# EAGLE board ProjV5Submission (EAGLE 9.6.2)
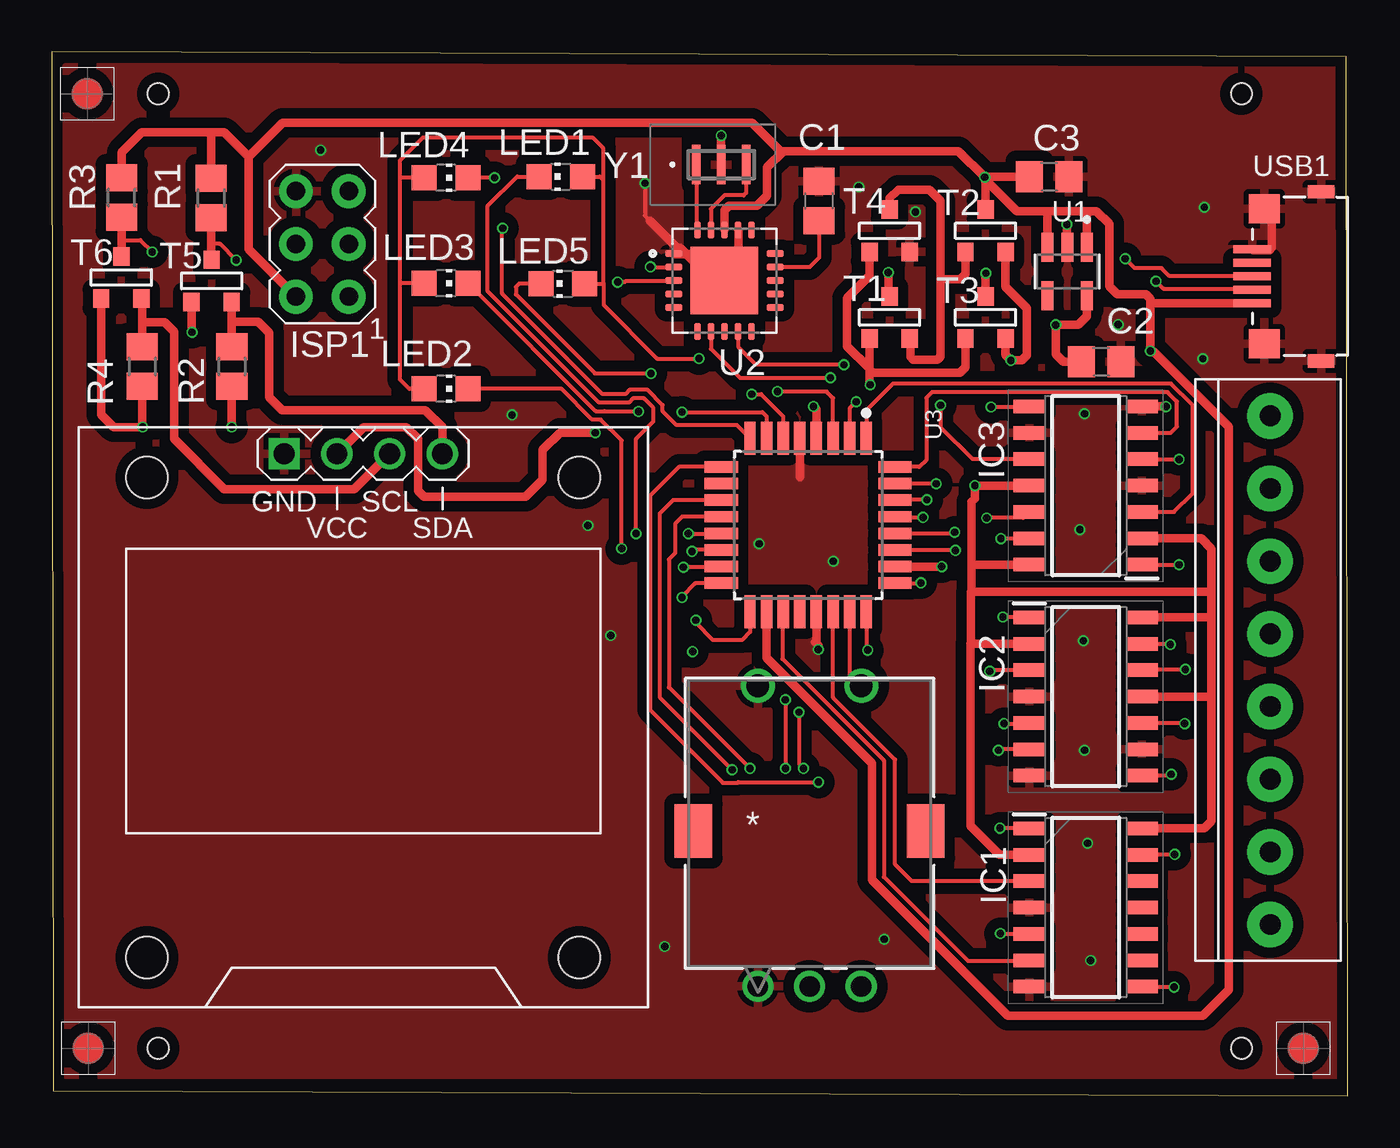
[diagram p0: board, top side]
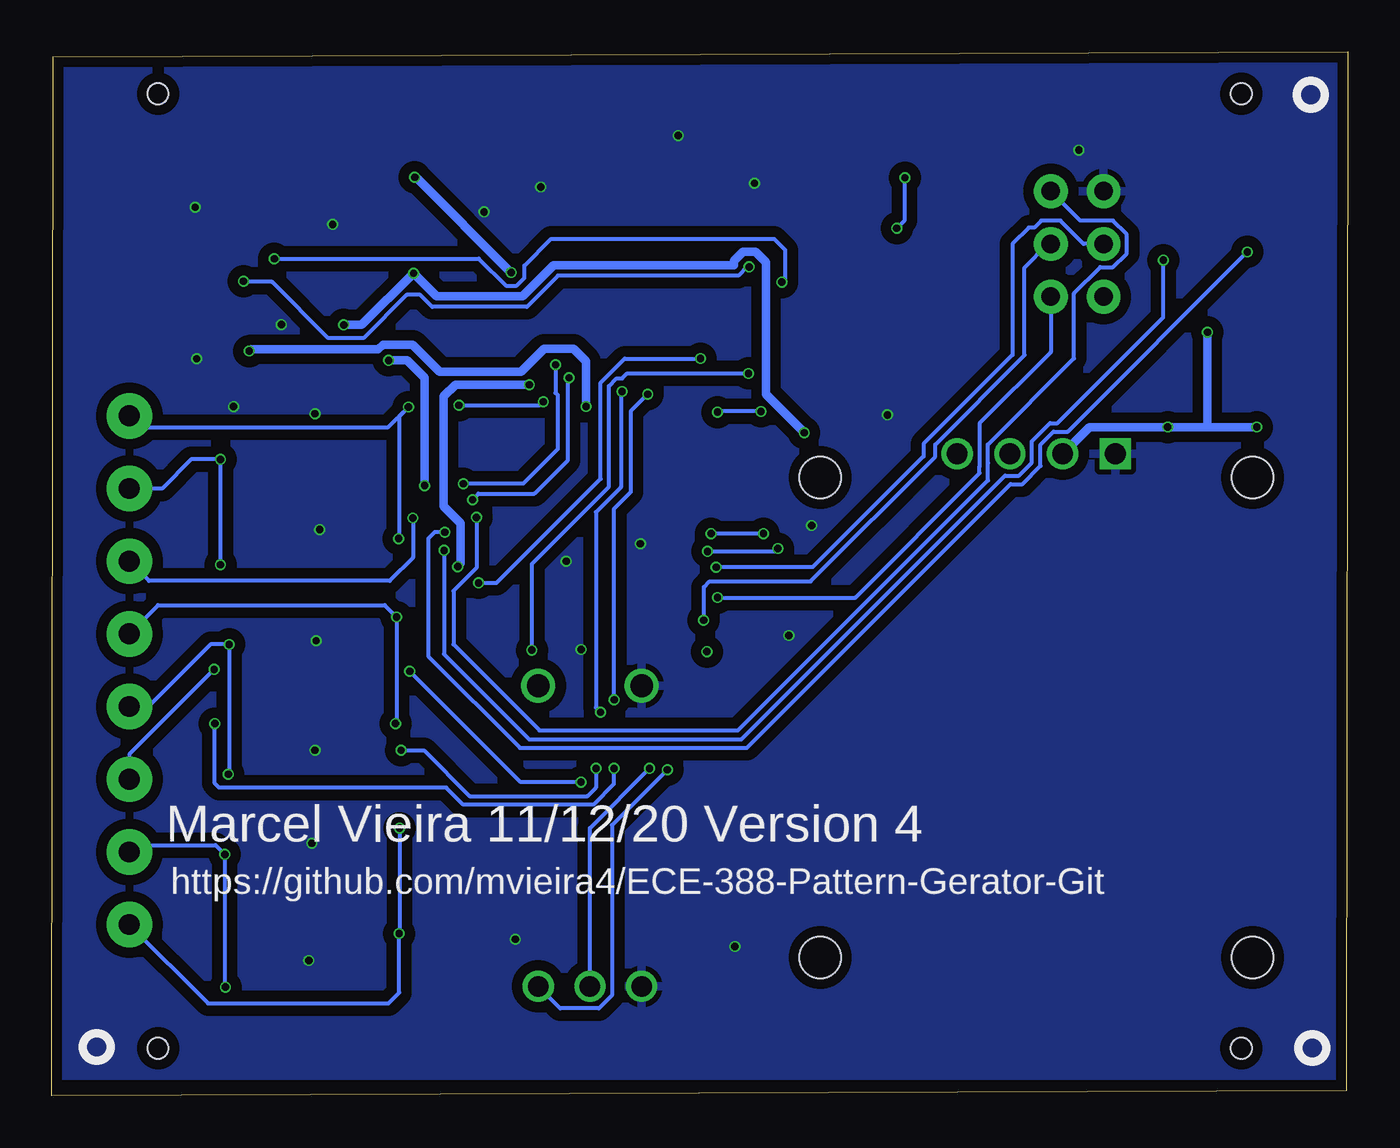
[diagram p1: board, bottom side, seen from below]

Size 62.42 x 50.27 mm. Coordinates in mm from the lower left corner, seen from the top.
Outline: 0.07,0.23 62.42,0 62.35,50.04 0,50.27 0.07,0.23
Copper layers (1*16): Top 0.035559375mm / dielectric 1.6mm / Bottom 0.035559375mm
Design rules "jlcpcb2layer": minimum track width 5mil, minimum drill 12mil, track to track 5mil, track to pad 5mil, pad to pad 5mil, via to via 5mil, smd to smd 5mil, copper to edge 8mil, drill to drill 6mil, minimum pad ring 5mil, minimum via ring 3mil, stop-mask expansion 2.5mil, vias tented up to drill 0mil, thermal gap 10mil
Holes 1 mm at 5.12,2.29 5.12,48.25 57.31,2.29 57.31,48.25

## Footprints (pad centres in the part's own frame; a part is rotated, then mirrored left to right if it is on the bottom)
C0805 = smd 1.3 x 1.5: 1 -0.95,0; 2 0.95,0
SOIC127P600X175-14N = smd 1.525 x 0.65: 1 -2.712,3.81; 2 -2.712,2.54; 3 -2.712,1.27; 4 -2.712,0; 5 -2.712,-1.27; 6 -2.712,-2.54; 7 -2.712,-3.81; 8 2.712,-3.81; 9 2.712,-2.54; 10 2.712,-1.27; 11 2.712,0; 12 2.712,1.27; 13 2.712,2.54; 14 2.712,3.81
AVRISP = drill 0.9 pad 1.626: 1 -1.27,2.54; 2 1.27,2.54; 3 -1.27,0; 4 1.27,0; 5 -1.27,-2.54; 6 1.27,-2.54
1X08-3.5MM = drill 1 pad 2.184: 1 -12.25,0; 2 -8.75,0; 3 -5.25,0; 4 -1.75,0; 5 1.75,0; 6 5.25,0; 7 8.75,0; 8 12.25,0
CHIP-LED0805 = smd 1.2 x 1.2: A 0,-1.05; C 0,1.05
R0805 = smd 1.3 x 1.5: 1 -0.95,0; 2 0.95,0
SOT-23 = smd 0.787 x 0.889: 1 0.025,-1.016; 2 -0.94,1.016; 3 0.991,1.016
SOT95P280X145-5N = smd 1.39 x 0.58: 1 -1.165,0.95; 2 -1.165,0; 3 -1.165,-0.95; 4 1.165,-0.95; 5 1.165,0.95
QFN65P500X500X100-21N = smd 0.81 x 0.32: 1 -2.45,1.3; 2 -2.45,0.65; 3 -2.45,0; 4 -2.45,-0.65; 5 -2.45,-1.3; 11 2.45,-1.3; 12 2.45,-0.65; 13 2.45,0; 14 2.45,0.65; 15 2.45,1.3 | smd 0.32 x 0.81: 6 -1.3,-2.45; 7 -0.65,-2.45; 8 0,-2.45; 9 0.65,-2.45; 10 1.3,-2.45; 16 1.3,2.45; 17 0.65,2.45; 18 0,2.45; 19 -0.65,2.45; 20 -1.3,2.45 | smd 3.25 x 3.25: 21 0,0
QFP80P900X900X120-32N = smd 1.6 x 0.55: 1 -4.18,2.8; 2 -4.18,2; 3 -4.18,1.2; 4 -4.18,0.4; 5 -4.18,-0.4; 6 -4.18,-1.2; 7 -4.18,-2; 8 -4.18,-2.8; 17 4.18,-2.8; 18 4.18,-2; 19 4.18,-1.2; 20 4.18,-0.4; 21 4.18,0.4; 22 4.18,1.2; 23 4.18,2; 24 4.18,2.8 | smd 0.55 x 1.6: 9 -2.8,-4.18; 10 -2,-4.18; 11 -1.2,-4.18; 12 -0.4,-4.18; 13 0.4,-4.18; 14 1.2,-4.18; 15 2,-4.18; 16 2.8,-4.18; 25 2.8,4.18; 26 2,4.18; 27 1.2,4.18; 28 0.4,4.18; 29 -0.4,4.18; 30 -1.2,4.18; 31 -2,4.18; 32 -2.8,4.18
EN11-HSM_TTE = drill 0.991 pad 1.499: 1 -2.489,7.874; 2 2.489,7.874; 3 0,7.874 | drill 1.092 pad 1.6: 4 -2.489,22.352; 5 2.489,22.352 | smd 1.803 x 2.591: 6 -5.601,15.354; 7 5.601,15.354
DISPLAY-OLED-128X64-I2C = drill 1 square: 1 -3.81,12.7 | drill 1: 2 -1.27,12.7; 3 1.27,12.7; 4 3.81,12.7 | hole 2: -10.414,11.557; 10.414,11.557; 10.414,-11.557; -10.414,-11.557
C77238 = smd 1.5 x 1.4: 0 0.825,0.814; 0A 0.825,7.314 | smd 1.27 x 0.635: 0B 3.566,8.139; 0C 3.566,-0.011 | smd 1.8 x 0.4: 1 0.244,2.768; 2 0.244,3.418; 3 0.244,4.068; 4 0.244,4.718; 5 0.244,5.369
CSTNE12M0G55A000R0 = smd 0.4 x 1.9: 1 1.2,0; 2 0,0; 3 -1.2,0

## Placement (x,y rotation side)
C1  1u  [C0805]  36.96,43.09 90 top
C2  1u  [C0805]  50.54,35.35 0 top
C3  1u  [C0805]  48.04,44.26 0 top
IC1  CD4007UBM  [SOIC127P600X175-14N]  49.8,9.06 0 top
IC2  CD4007UBM  [SOIC127P600X175-14N]  49.8,19.22 0 top
IC3  CD4007UBM  [SOIC127P600X175-14N]  49.8,29.38 180 top
ISP1  AVRISP-6  [AVRISP]  13.03,41.02 180 top
JP1  [1X08-3.5MM]  58.69,20.49 270 top
LED1  [CHIP-LED0805]  24.51,44.26 90 top
LED2  [CHIP-LED0805]  18.99,34.04 270 top
LED3  [CHIP-LED0805]  18.99,39.12 270 top
LED4  [CHIP-LED0805]  18.99,44.2 270 top
LED5  [CHIP-LED0805]  24.61,39.11 90 top
R1  10k  [R0805]  7.68,43.24 90 top
R2  10k  [R0805]  8.67,35.12 270 top
R3  10k  [R0805]  3.36,43.25 90 top
R4  10k  [R0805]  4.35,35.11 270 top
T1  [SOT-23]  40.38,37.48 180 top
T2  [SOT-23]  45,41.65 180 top
T3  [SOT-23]  45,37.48 180 top
T4  [SOT-23]  40.38,41.65 180 top
T5  [SOT-23]  7.72,39.24 180 top
T6  [SOT-23]  3.37,39.4 180 top
U1  MIC5504-3.3YM5-T5  [SOT95P280X145-5N]  48.91,39.69 270 top
U2  MCP2200-I/MQ  [QFN65P500X500X100-21N]  32.4,39.25 0 top
U3  ATMEGA328PB-AU  [QFP80P900X900X120-32N]  36.43,27.48 270 top
U4  EN11-HSM1BF20  [EN11-HSM_TTE]  36.5,-2.61 0 top
U$1  DISPLAY-OLED-128X64-I2C  [DISPLAY-OLED-128X64-I2C]  15,18.22 0 top
U$2  [FIDUCIAL_G15S]  1.75,2.29 0 top
U$3  [FIDUCIAL_G15S]  1.7,48.25 0 top
U$4  [FIDUCIAL_G15S]  60.29,2.29 0 top
USB1  C77238  [C77238]  57.58,35.4 0 top
Y1  CSTNE12M0G55A000R0  [CSTNE12M0G55A000R0]  32.25,44.84 180 top

## Library data of the parts
C1-C3 = rcl; SPICEPREFIX: C
IC1-IC3 = CD4007UBM; ARROW_PART_NUMBER: CD4007UBM; ARROW_PRICE-STOCK: https://www.arrow.com/en/products/cd4007ubm/texas-instruments; DESCRIPTION: Texas Instruments CD4007UBM Inverter, 3 18 V, 14-Pin SOIC; HEIGHT: 1.75mm; MANUFACTURER_NAME: Texas Instruments; MANUFACTURER_PART_NUMBER: CD4007UBM; MOUSER_PART_NUMBER: 595-CD4007UBM; MOUSER_PRICE-STOCK: https://www.mouser.co.uk/ProductDetail/Texas-Instruments/CD4007UBM?qs=LfG3tU9ud8BhOMkMTdqqtw%3D%3D
ISP1 JP1 = adafruit
LED1-LED5 = led
R1-R4 = rcl; SPICEPREFIX: R
T1-T6 = zetex; OC_FARNELL: unknown; OC_NEWARK: unknown
U1 = MIC5504-3.3YM5-T5; AVAILABILITY: Good; DESCRIPTION: Linear Voltage Regulator IC 1 Output 300mA SOT-23-5; MF: Microchip; MP: MIC5504-3.3YM5-T5; PACKAGE: SOT-23-5 Microchip; PRICE: None; PURCHASE-URL: https://pricing.snapeda.com/search/part/MIC5504-3.3YM5-T5/?ref=eda
U2 = MCP2200-I_MQ; AVAILABILITY: Good; DESCRIPTION: USB Bridge, USB to UART USB 2.0 UART Interface 20-VQFN (5x5); MF: Microchip; MP: MCP2200-I/MQ; PACKAGE: VQFN-20 Microchip; PRICE: None; PURCHASE-URL: https://pricing.snapeda.com/search/part/MCP2200-I/MQ/?ref=eda
U3 = ATMEGA328PB-AU; AVAILABILITY: Good; DESCRIPTION: 8-bit Microcontrollers - MCU ATMEGA328PB 20MHZ IND TEMP; MF: Microchip Technology / Atmel; MP: ATMEGA328PB-AU; PACKAGE: None; PRICE: None; PURCHASE-URL: https://pricing.snapeda.com/search/part/ATMEGA328PB-AU/?ref=eda
U4 = EN11-HSM1BF20; MANUFACTURER_PART_NUMBER: EN11-HSM1BF20; SOURCELIBRARY: TTELECTRONICS_2018-05-01A; VENDOR: TT Electronics
U$1 = diy-modules
U$2-U$4 = dicons
USB1 = usbFromLCSC
Y1 = CSTNE12M0G55A000R0; ARROW_PART_NUMBER: CSTNE12M0G55A000R0; ARROW_PRICE-STOCK: https://www.arrow.com/en/products/cstne12m0g55a000r0/murata-manufacturing; DESCRIPTION: Resonators 12.0000MHz 33pF SMD CHP Resntr AUTO GRD; HEIGHT: 0.8mm; MANUFACTURER_NAME: Murata Electronics; MANUFACTURER_PART_NUMBER: CSTNE12M0G55A000R0; MOUSER_PART_NUMBER: 81-CSTNE12M0G55A000R; MOUSER_PRICE-STOCK: https://www.mouser.com/Search/Refine.aspx?Keyword=81-CSTNE12M0G55A000R

## Nets
0: C1.2 C2.2 C3.2 IC1.4 IC1.7 IC2.4 IC2.7 IC2.9 IC3.4 IC3.7 IC3.9 ISP1.6 T4.2 U1.2 U2.1 U2.17 U2.21 U3.5 U3.21 U4.1 U4.4 U$1.1 USB1.0 USB1.0A USB1.0B USB1.0C USB1.5 Y1.2
+3V3: C2.1 R2.2 R4.2 T3.1 T5.3 T6.3 U1.5 U$1.2
+5V: C3.1 ISP1.2 R1.2 R3.2 T1.1 T2.1 U1.1 U1.3 U2.18 U3.4 U3.18 USB1.1
C1: IC3.8 IC3.13 JP1.1
C2: IC3.1 IC3.5 JP1.2
C3: IC3.12 JP1.3
C4: IC2.1 IC2.5 JP1.4
C5: IC2.8 IC2.13 JP1.5
C6: IC2.12 JP1.6
C7: IC1.8 IC1.13 JP1.7
C8: IC1.1 IC1.5 JP1.8
CLK: U3.12 U4.3
D+: U2.3 USB1.3
D-: U2.2 USB1.2
DT: U3.23 U4.5
LC: IC1.2 IC1.14 IC2.2 IC2.11 IC2.14 IC3.2 IC3.11 IC3.14 T2.2 T3.2
LC1: IC3.6 U3.32
LC2: IC3.3 U3.1
LC3: IC3.10 U3.2
LC4: IC2.3 U3.9
LC5: IC2.6 U3.3
LC6: IC2.10 U3.6
LC7: IC1.6 U3.19
LC8: IC1.3 U3.22
LED1: LED1.C U3.13
LED2: LED2.C U3.14
LED3: LED3.C U3.7
LED4: LED4.C U3.8
LED5: LED5.C U3.24
LEDA: LED1.A LED2.A LED3.A LED4.A LED5.A U3.25
MISO: ISP1.1 U3.16
MOSI: ISP1.4 U3.15
N$1: IC1.9
N$2: IC1.10
N$3: IC1.11
N$4: U3.10
N$5: IC1.12
N$6: U2.19 Y1.3
N$7: C1.1 U2.14
N$9: T1.2 T2.3 T4.1
N$10: U2.7 U3.30
N$11: U2.9 U3.31
N$14: U2.20 Y1.1
N$16: R2.1 T5.2 U$1.4
N$19: R4.1 T6.2 U$1.3
N$30: U3.20
RST: ISP1.5 U3.29
SCK: ISP1.3 U3.17
SCL: R3.1 T6.1 U3.28
SDA: R1.1 T5.1 U3.27
SW: U3.11 U4.2
VSET: T1.3 T3.3 T4.3 U3.26

## Tracks (layer width: path | path; a pad name or v marks a point on that pad's centre or on a via)
0  (via drill 0.35)
  Top 0.203: v28.57,43.94 28.57,42.39 28.82,42.14
  Top 0.406: IC3.7 v53.66,33.19 v53.67,33.19 | U3.21 36.83,21.89 36.77,21.83 36.92,21.68 v36.92,21.48 | U1.2 48.9,40.87 v48.9,41.96 | Y1.2 v32.25,46.23 | USB1.0A 58.78,42.33 58.78,40.84 58.66,40.72 57.87,40.72 USB1.5 | U2.1 29.98,40.53 31.05,40.53 32.33,39.25 U2.21 | U2.21 32.48,39.25 33.08,39.84 33.08,41.68 U2.17 | U2.21 31.86,39.25 30.27,40.84 30.12,40.84 28.82,42.14 | U3.5 36.03,29.77
  other vias: 12.95,45.54 22.17,32.79 51.37,37.14 38.87,43.76 55.52,42.79 41.59,42.56 49.75,32.84 49.52,27.26 49.7,21.91 49.75,16.63 50.05,6.51 49.9,12.16 26.92,22.16 34.07,26.58 37.65,25.73 55.45,35.48 40.09,7.54 29.52,7.19 25.82,27.46
  pour Top (isolate 0.508): 0.66,49.53 0.66,1.01 62.27,1.01 62.27,49.53
  pour Bottom (isolate 0.508): 0.56,49.59 0.56,0.96 61.89,0.96 61.89,49.59
+3V3  (via drill 0.35)
  Top 0.406: T5.3 6.73,36.78 v6.75,36.76 | R2.2 v8.67,32.2 | R4.2 4.35,32.23 | 4.35,32.23 v4.38,32.2 | T6.3 2.38,32.79 2.97,32.2 4.32,32.2 4.35,32.23 | U1.5 49.86,37.54 49.44,37.12 v48.36,37.12 48.36,35.71 48.72,35.35 C2.1 | T3.1 44.98,39.59 v45,39.61 | U$1.2 15.01,32.2 17.07,32.2 17.64,31.63 17.64,29.14 17.94,28.84 22.83,28.84 23.64,29.65 23.64,31.1 24.47,31.93 v26.18,31.93
  Bottom 0.406: U$1.2 13.71,30.92 12.45,32.18 8.69,32.18 v8.67,32.2 6.78,32.2 | v4.38,32.2 6.78,32.2 | v48.36,37.12 47.49,37.12 v45,39.61 43.89,38.5 39.75,38.5 38.25,40 29.57,40 29.57,40.21 29.14,40.64 28.53,40.64 28.01,40.12 28.01,33.79 26.18,31.96 v26.18,31.93 | v6.75,36.76 6.75,32.23 6.78,32.2
+5V  (via drill 0.35)
  Top 0.406: R3.2 3.36,45.43 4.32,46.39 7.71,46.39 | ISP1.2 9.48,40.76 9.48,45.22 | 9.48,45.22 8.31,46.39 7.71,46.39 | R1.2 7.68,46.36 7.71,46.39 | T1.1 40.29,38.56 v40.29,39.64 | v44.94,44.23 44.98,44.2 T2.1 | C3.1 44.97,44.26 | 44.97,44.26 v44.94,44.23 | 47.83,42.6 46.48,42.6 44.97,44.11 44.97,44.26 | U1.3 47.96,42.47 47.83,42.6 | 49.78,42.6 50.32,42.6 50.94,41.98 50.94,38.98 51.33,38.59 52.71,38.59 52.92,38.38 52.92,38.14 | 49.78,42.6 47.83,42.6 | 49.78,42.6 49.86,42.52 U1.1 | U2.18 32.4,42.64 32.61,42.85 33.96,42.85 34.45,43.34 34.45,44.71 35.23,45.49 | v44.94,44.23 43.68,45.49 35.23,45.49 | U3.4 36.83,33.05 v36.69,33.19 | 35.23,45.49 35.1,45.49 33.73,46.86 11.12,46.86 9.48,45.22 | U3.18 34.43,21.08 39.51,16 39.51,10.39 46.05,3.85 55.44,3.85 56.7,5.11 56.7,32.22 53.06,35.86 v52.92,35.86 52.92,38.14 | USB1.1 52.94,38.16 52.92,38.14
  Bottom 0.406: v40.29,39.64 44.88,44.23 v44.94,44.23 | v36.69,33.19 36.69,35.38 37.29,35.98 38.7,35.98 39.81,34.87 43.74,34.87 45.04,36.17 46.47,36.17 46.7,35.95 52.83,35.95 v52.92,35.86
C1  (via drill 0.35)
  Top 0.203: IC3.8 47.06,33.16 v45.25,33.16 | IC3.13 47.08,26.83 v45.72,26.83
  Bottom 0.203: v45.72,26.83 45.69,26.86 45.69,32.72 v45.25,33.16 46.22,32.19 58.14,32.19 JP1.1
C2  (via drill 0.35)
  Top 0.203: IC3.5 v54.29,30.65 v54.3,30.64 | IC3.1 v54.3,25.57
  Bottom 0.203: JP1.2 57.11,29.24 55.71,30.64 v54.3,30.64 v54.3,25.57
C3  (via drill 0.35)
  Top 0.203: IC3.12 46.8,27.82 v45.03,27.82
  Bottom 0.203: v45.03,27.82 45.03,25.91 46.15,24.79 57.74,24.79 JP1.3
C4  (via drill 0.35)
  Top 0.203: IC2.1 45.83,23.03 v45.81,23.05 | v45.87,17.92 47.06,17.92 IC2.5
  Bottom 0.203: v45.87,17.92 45.81,17.98 45.81,20.18 45.81,20.7 v45.81,23.05 46.38,23.62 57.31,23.62 JP1.4
C5  (via drill 0.35)
  Top 0.203: IC2.13 53.85,21.76 v53.88,21.73 | v53.92,15.47 53.86,15.41 IC2.8
  Bottom 0.203: v53.92,15.47 53.88,15.52 v53.88,21.73 54.78,21.73 57.77,18.74 JP1.5
C6  (via drill 0.35)
  Top 0.203: IC2.12 52.55,20.53 v54.6,20.53
  Bottom 0.203: v54.6,20.53 58.69,16.44 JP1.6
C7  (via drill 0.35)
  Top 0.203: IC1.13 54.07,11.6 v54.09,11.62 | v54.06,5.23 52.53,5.23 IC1.8
  Bottom 0.203: v54.06,5.23 54.09,5.26 v54.09,11.62 54.54,12.07 58.36,12.07 JP1.7
C8  (via drill 0.35)
  Top 0.203: IC1.1 45.68,12.87 v45.66,12.88 | v45.69,7.81 47.07,7.81 IC1.5
  Bottom 0.203: v45.66,12.88 45.66,7.84 v45.69,7.81 45.69,4.96 46.2,4.45 54.9,4.45 JP1.8
CLK  (via drill 0.35)
  Top 0.203: U3.12 30.36,27.88 30.02,27.54 30.02,26.12 29.73,25.83 29.73,19.66 v33.63,15.76
  Bottom 0.203: U4.3 36.5,12.89 v33.63,15.76
D+  (via drill 0.35)
  Top 0.203: U2.3 29.92,39.22 27.63,39.22 27.59,39.18 v27.26,39.18 | USB1.3 53.84,39.46 53.45,39.85 52.16,39.85 v51.7,40.31
  Bottom 0.203: v27.26,39.18 27.09,39.35 27.09,40.72 27.63,41.26 38.37,41.26 39.66,39.97 39.66,39.38 40.03,39.01 40.55,39.01 41.85,40.31 v51.7,40.31
D-  (via drill 0.35)
  Top 0.203: U2.2 28.84,39.9 v28.83,39.91 | v53.19,39.22 53.55,38.86 57.78,38.86 USB1.2
  Bottom 0.203: v53.19,39.22 53.16,39.19 51.81,39.19 49.11,36.49 47.4,36.49 45.33,38.56 44.67,38.56 44.1,37.99 39.54,37.99 38.04,39.49 29.36,39.49 28.94,39.91 v28.83,39.91
DT
  Top 0.203: U3.23 38.43,20.3 U4.5
LC  (via drill 0.35)
  Top 0.406: T2.2 45.94,38.95 46.98,37.91 46.98,35.65 46.74,35.41 v46.2,35.41 45.94,35.67 T3.2 | IC3.11 v44.46,29.38 44.46,28.75 44.3,28.59 44.3,25.56 | 44.25,21.76 44.25,13 45.65,11.6 IC1.2 | IC2.2 44.25,21.76 | IC3.2 55.37,26.84 55.86,26.35 55.86,24.28 | 55.86,24.28 55.86,23.05 | 55.86,23.05 55.86,19.24 | 55.86,19.24 55.86,13.21 55.52,12.87 IC1.14 | IC2.11 55.84,19.22 55.86,19.24 | IC2.14 55.84,23.03 55.86,23.05 | 44.3,24.28 44.28,24.28 44.28,21.79 44.25,21.76 | 44.3,24.28 55.86,24.28 | 44.3,24.28 44.3,25.56 | IC3.14 44.31,25.57 44.3,25.56
  Bottom 0.406: v44.46,29.38 44.46,34.57 45.3,35.41 v46.2,35.41
LC1
  Top 0.203: IC3.6 53.9,31.92 54.2,32.22 54.2,33.42 53.74,33.88 42.4,33.88 42.12,33.6 42.12,30.61 41.79,30.28 U3.32
LC2
  Top 0.203: IC3.3 54.05,28.11 54.96,29.02 54.96,33.24 53.91,34.29 40.52,34.29 39.23,33 U3.1
LC3  (via drill 0.35)
  Top 0.203: IC3.10 44.36,30.65 42.81,32.2 v42.81,33.25 | v38.75,33.42 38.43,33.1 U3.2
  Bottom 0.203: v42.81,33.25 38.92,33.25 v38.75,33.42
LC4  (via drill 0.35)
  Top 0.203: IC2.3 45.23,20.49 v45.18,20.44 | U3.9 30.21,30.28 28.81,28.88 28.81,18.58 32.32,15.07 33.03,15.07 33.07,15.1 v36.93,15.1
  Bottom 0.203: v45.18,20.44 39.87,15.13 36.96,15.13 v36.93,15.1
LC5  (via drill 0.35)
  Top 0.203: IC2.6 45.65,16.68 v45.6,16.63 | U3.3 37.63,33.59 37.31,33.91 v34.95,33.91 | v36.21,15.76 35.99,15.98 v35.99,18.47
  Bottom 0.203: v45.6,16.63 44.5,16.63 42.29,14.42 36.62,14.42 36.21,14.84 v36.21,15.76 | v35.99,18.47 36.21,18.69 36.21,28.1 35.01,29.3 35.01,33.85 v34.95,33.91
LC6  (via drill 0.35)
  Top 0.203: IC2.10 54.54,17.95 v54.57,17.92 | v33.72,33.78 34.16,33.78 35.23,32.71 U3.6 | v35.33,19.07 v35.33,15.77 v35.34,15.76
  Bottom 0.203: v35.33,19.07 v35.34,19.08 35.34,28.27 34.54,29.07 34.54,32.95 v33.72,33.78 | v35.34,15.76 35.34,15.01 36.34,14.02 42.6,14.02 43.42,14.84 54.37,14.84 54.57,15.04 v54.57,17.92
LC7
  Top 0.203: IC1.6 47.06,6.49 44.13,6.49 40.08,10.54 40.08,16.15 35.19,21.04 35.19,23.26 U3.19
LC8
  Top 0.203: IC1.3 41.43,10.33 40.62,11.14 40.62,16.18 37.63,19.17 U3.22
LED1  (via drill 0.35)
  Top 0.203: LED1.C 22.41,44.26 21,42.85 21,38.74 26.36,33.38 27.79,33.38 28,33.58 28.52,33.58 28.98,33.12 28.98,32.47 28.14,31.63 v28.14,27.07 | v30.66,27.07 U3.13
  Bottom 0.203: v28.14,27.07 v30.66,27.07
LED2  (via drill 0.35)
  Top 0.203: U3.14 30.91,26.28 v30.84,26.21 | v27.45,26.35 27.45,31.55 26.44,32.56 26.02,32.56 24.55,34.04 LED2.C
  Bottom 0.203: v30.84,26.21 27.45,26.21 v27.45,26.35
LED3  (via drill 0.35)
  Top 0.203: LED3.C 26.19,32.97 26.61,32.97 26.63,32.95 v28.26,32.95 | v30.36,32.92 34.23,32.92 34.43,32.72 U3.7
  Bottom 0.203: v28.26,32.95 30.33,32.95 v30.36,32.92
LED4  (via drill 0.35)
  Top 0.203: U3.8 33,32.29 30.1,32.29 29.42,32.97 29.42,33.26 28.69,33.99 27.83,33.99 27.62,33.78 26.53,33.78 21.69,38.62 21.69,41.74 v21.72,41.77 | v21.33,44.2 LED4.C
  Bottom 0.203: v21.72,41.77 21.36,42.13 21.36,44.17 v21.33,44.2
LED5  (via drill 0.35)
  Top 0.203: U3.24 39.23,21.53 v39.3,21.46 | v28.86,34.78 26.16,34.78 22.35,38.59 22.35,38.95 22.51,39.11 LED5.C
  Bottom 0.203: v39.3,21.46 39.3,25.61 35.58,29.33 35.58,34.17 35.21,34.54 34.95,34.54 34.71,34.78 v28.86,34.78
LEDA  (via drill 0.35)
  Top 0.203: LED2.A 17.21,34.04 16.77,34.48 16.77,39.16 | 16.77,39.16 16.77,44.23 | 16.77,44.23 16.77,45.04 17.88,46.15 26.04,46.15 26.55,45.64 26.55,44.11 | 26.55,44.11 26.55,39.11 | LED1.A 26.4,44.26 26.55,44.11 | LED5.A 26.55,39.11 | 26.55,39.11 26.58,39.11 26.58,38.08 29.16,35.5 v31.17,35.5 | LED3.A 16.81,39.12 16.77,39.16 | LED4.A 16.8,44.2 16.77,44.23 | U3.25 41.85,24.68 v41.87,24.7
  Bottom 0.203: v41.87,24.7 41,24.7 35.99,29.71 35.99,34.34 34.83,35.5 v31.17,35.5
MISO  (via drill 0.35)
  Top 0.203: U3.16 30.99,24.67 30.34,24.01 v30.36,23.99
  Bottom 0.203: ISP1.1 14.3,35.81 17.73,32.38 17.73,30.31 17.73,29.98 23.72,23.99 v30.36,23.99
MOSI  (via drill 0.35)
  Top 0.203: U3.15 32.22,25.45 v30.42,25.45
  Bottom 0.203: ISP1.4 12.72,41.02 13.84,42.14 14.76,42.14 15.1,41.8 15.36,41.8 16.14,41.02 16.14,35.68 20.43,31.39 20.43,30.79 25.77,25.45 v30.42,25.45
N$6
  Top 0.203: Y1.3 33.45,43.48 33.33,43.36 32.4,43.36 32.19,43.15 31.75,42.71 U2.19
N$7
  Top 0.203: C1.1 36.96,40.36 36.5,39.9 U2.14
N$9
  Top 0.406: T4.1 40.36,43.22 40.77,43.63 42.27,43.63 42.81,43.09 42.81,39.31 | T1.2 41.35,36.43 41.35,35.58 41.48,35.45 42.67,35.45 42.81,35.59 42.81,39.31 | T2.3 44.01,39.55 43.77,39.31 42.81,39.31
N$10  (via drill 0.35)
  Top 0.203: U2.7 31.75,35.97 33.15,34.57 v37.51,34.57 | v42.16,28.7 40.63,28.7 U3.30
  Bottom 0.203: v42.16,28.7 41.87,28.99 39.17,28.99 37.59,30.57 37.59,34.5 v37.51,34.57
N$11  (via drill 0.35)
  Top 0.203: U2.9 33.05,36.08 33.93,35.2 v38.16,35.2 | v42.6,29.47 U3.31
  Bottom 0.203: v38.16,35.2 38.16,33.85 38.05,33.74 38.05,31.14 39.72,29.47 v42.6,29.47
N$14
  Top 0.203: Y1.1 31.05,41.76 U2.20
N$15  (via drill 0.35)
  other vias: 30.87,21.38
N$16
  Top 0.406: T5.2 8.67,37.27 | 8.67,37.27 R2.1 | U$1.4 18.81,32.18 17.98,33.01 11.1,33.01 10.47,33.64 10.47,36.73 9.93,37.27 8.67,37.27
N$19
  Top 0.406: T6.2 4.35,38.34 4.35,37.24 | 4.35,37.24 R4.1 | 4.35,37.24 5.43,37.24 5.88,36.79 5.88,31.63 8.31,29.2 14.55,29.2 U$1.3
RST  (via drill 0.35)
  Top 0.203: U3.29 40.64,27.85 v41.97,27.85
  Bottom 0.203: v41.97,27.85 41.97,25.42 43.08,24.31 43.08,21.73 38.94,17.59 29.37,17.59 17.32,29.64 17.32,30.48 17.33,30.48 17.33,31.36 13.18,35.51 13.18,38.64 11.92,39.9 11.3,39.9 10.64,40.56 10.64,41.48 11.3,42.14 12.88,42.14 ISP1.5
SCK  (via drill 0.35)
  Top 0.203: v31.02,22.9 31.02,22.78 31.86,21.94 33.24,21.94 33.63,22.33 U3.17
  Bottom 0.203: v31.02,22.9 31.02,24.49 30.73,24.77 25.88,24.77 19.87,30.78 19.87,31.36 15.57,35.66 15.57,39.88 14.43,41.02 ISP1.3
SCL  (via drill 0.35)
  Top 0.203: 3.36,41.2 4.26,41.2 v4.83,40.63 | U3.28 43.43,27.08 v43.49,27.14
  Top 0.406: R3.1 3.36,41.2 3.36,40.43 T6.1
  Bottom 0.203: v4.83,40.63 13.48,31.98 14.17,31.98 14.79,31.36 14.79,30.33 15.66,29.45 16.24,29.45 28.94,16.75 39.87,16.75 44.29,21.17 44.29,26.82 43.97,27.14 v43.49,27.14
SDA  (via drill 0.35)
  Top 0.203: v43.53,26.26 40.63,26.26 U3.27 | v8.88,40.24 8.1,41.02 7.68,41.02
  Top 0.406: R1.1 7.68,41.02 T5.1
  Bottom 0.203: v43.53,26.26 43.53,21.27 39.42,17.16 29.2,17.16 16.5,29.86 15.83,29.86 15.21,30.48 15.21,31.51 14.34,32.38 13.97,32.38 8.88,37.48 v8.88,40.24
SW  (via drill 0.35)
  Top 0.203: U3.11 29.93,28.68 29.28,28.03 29.28,19.19 v32.77,15.7
  Bottom 0.203: v32.77,15.7 35.45,13.03 35.45,4.83 36.06,4.21 37.94,4.21 U4.2
VSET  (via drill 0.35)
  Top 0.406: T3.3 44.01,35.08 43.74,34.81 39.57,34.81 39.39,34.99 | 39.39,35.02 39.39,34.99 | 39.39,35.02 T1.3 | T4.3 39.39,39.49 38.31,38.41 38.31,36.1 39.39,35.02 | 39.39,34.99 39.39,34.27 v39.42,34.24 | v42.87,25.48 U3.26
  Bottom 0.406: v39.42,34.24 42.98,34.24 43.54,33.67 43.54,28.39 42.72,27.56 42.72,25.63 v42.87,25.48

## Text on the board
bPlace: Marcel Vieira 11/12/20 Version 4 | https://github.com/mvieira4/ECE-388-Pattern-Gerator-Git